# Altium PCB LED_PCB_v2.PcbDoc
Units mil, origin at the board's own origin, x right, y up, seen from the top; angles counter-clockwise.
Board outline 1457.5 x 607.5 mil, 2 copper layers (Top Layer, Bottom Layer); 9 components, 6 nets, 29 pads, 0 vias.
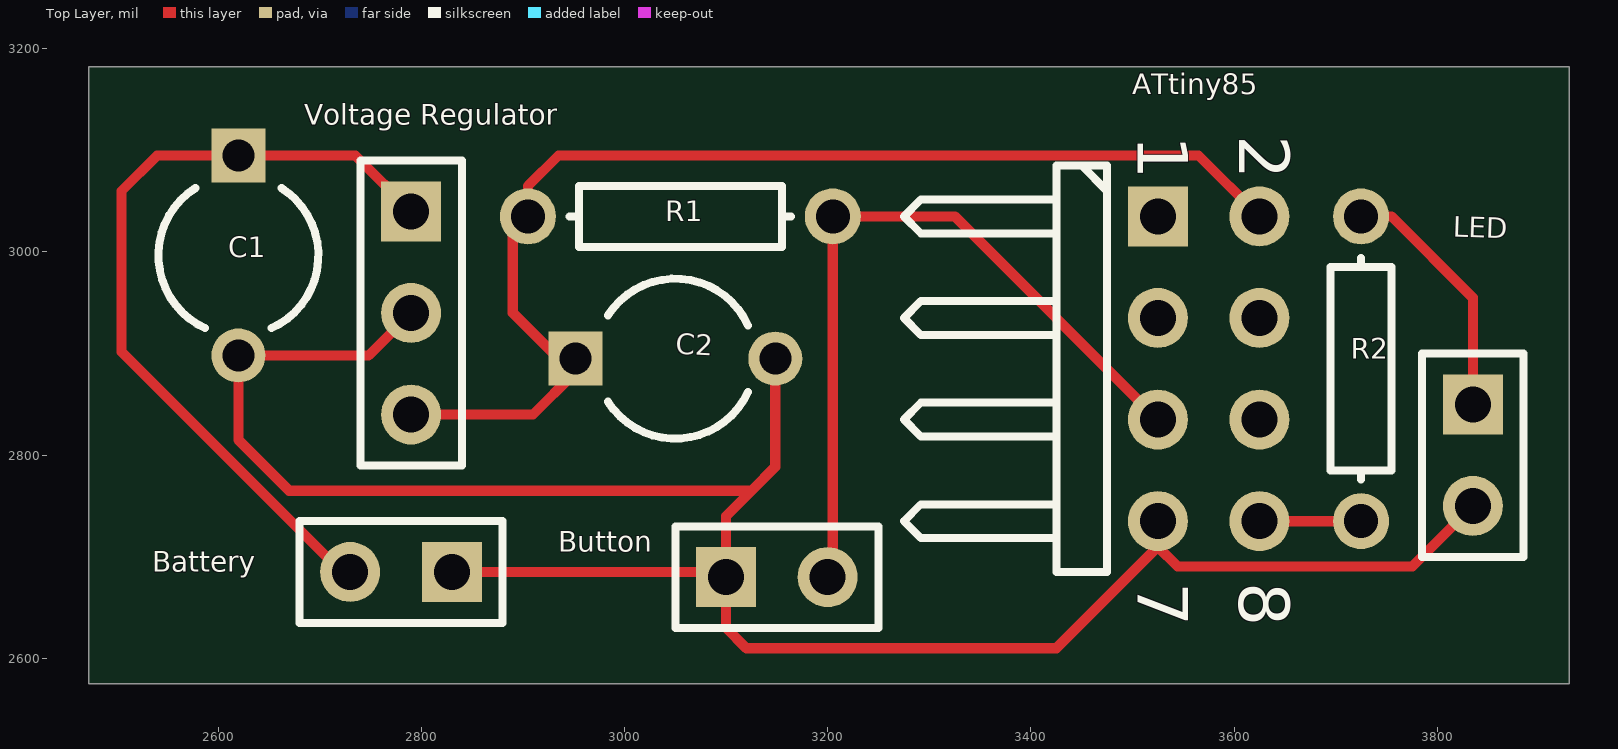
[diagram p0: Top Layer view]
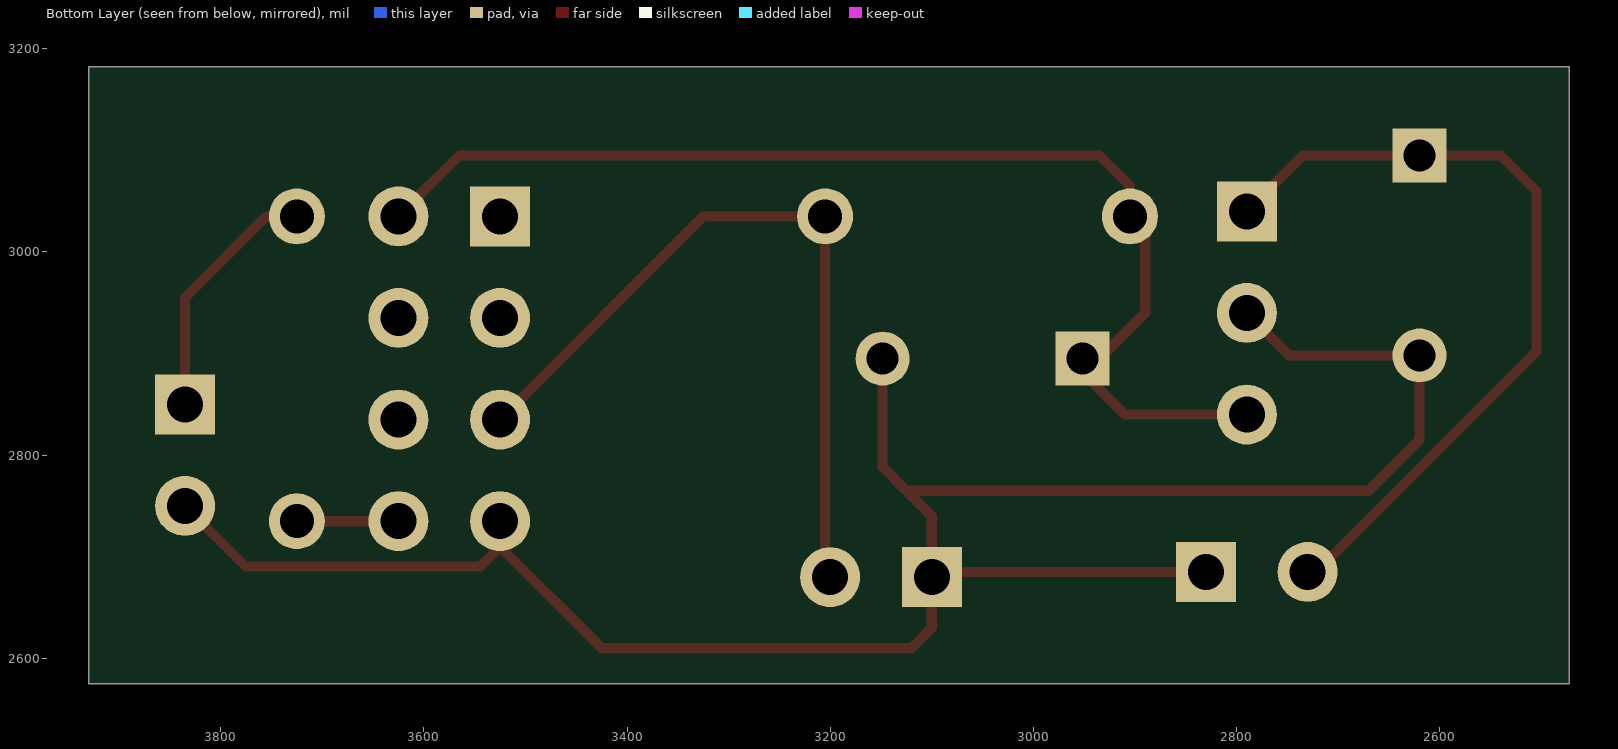
[diagram p1: Bottom Layer view, seen from below]

## Layer stack, top to bottom
Top Solder: solder mask 0.4, Solder Resist, Dk 3.5
Top Layer: signal copper 1.4
Dielectric 1: dielectric 12.6, FR-4, Dk 4.8
Bottom Layer: signal copper 1.4
Bottom Solder: solder mask 0.4, Solder Resist, Dk 3.5

## Board outline
2472.5,2575 3930,2575 3930,3182.5 2472.5,3182.5

## Design rules (kind name [scope] priority, off if disabled: settings)
Clearance [All] p1: gap=10 ignorepadtopadclearanceinfootprint=FALSE except(0: Arc-Hole Track-Hole SMDPad-Hole THPad-Hole Via-Hole Fill-Hole Poly-Hole Region-Hole Text-Hole)
PolygonConnect [All] p1: connectstyle=Relief reliefconductorwidth=10 reliefentries=4 polygonreliefangle="90 Angle" airgapwidth=10
RoomDefinition LED_Schematic_v3 [InComponentClass('LED_Schematic_v3')] p1: confinementstyle=ConfineIn formatcopy=TRUE lockcomponents=FALSE outline 2470,2575 3920,2575 3920,3180 2470,3180
RoutingVias [All] p1: holewidth=28 width=50 viastyle="Through Hole" minholewidth=28 minwidth=50 maxholewidth=28 maxwidth=50
SolderMaskExpansion [All] p1: expansion=4
Width [All] p1: maxlimit=10 minlimit=10 preferedwidth=10
30 further rules are at their usual default settings.

## Components (designator, comment, footprint, x,y, rotation, side; value= is the part's Value field where it differs from the comment)
ATtiny85 "Header 4X2H" HDR2X4H 3525,3035 r270 top
Battery "Header 2" HDR1X2 2830,2685 r180 top (schematic designator "9V Battery")
Button "Header 2" HDR1X2 3100,2680 r0 top
C1 "Capacitor" CAPR5-4X5 2620,2996.57 r270 top value=100pF
C2 "Capacitor" CAPR5-4X5 3050,2895 r0 top value=100pF
LED "Header 2" HDR1X2 3835,2850 r270 top
R1 "Resistor" AXIAL-0.3 3055,3035 r0 top value=4.7K
R2 "Resistor" AXIAL-0.3 3725,2885 r270 top value=1K
"Voltage Regulator" "3 pin header" HDR1X3 2790,3040 r270 top (schematic designator "Voltage Regulator - L7805")

## Footprints (in the part's own frame and the unit in brackets; to place one, negate y for a bottom-side part, rotate by r counter-clockwise, add the part's x,y. Pads: shape width x height; smd on the part's side, far side on the other; paste and mask are expansions set on the pad)
AXIAL-0.3 [mm] "Axial Device, Thru-Hole; 2 Leads; 0.3 in Pin Spacing"
  round 1.4 hole 0.85: 1(-3.81,0) 2(3.81,0)
  silkscreen extent -2.77,-0.76 2.77,0.76
CAPR5-4X5 [mm] "Capacitor; 2 Leads"
  rect 1.35x1.35 hole 0.8: 1(-2.5,0)
  round 1.35 hole 0.8: 2(2.5,0)
  silkscreen extent -1.69,-2 1.82,2
HDR1X2 [mm] "Connector; Header; 2 Position"
  rect 1.5x1.5 hole 0.9: 1(0,0)
  round 1.5 hole 0.9: 2(2.54,0)
  silkscreen extent -1.27,-1.27 3.81,1.27
HDR1X3 [mm] "Connector; Header; 3 Position"
  rect 1.5x1.5 hole 0.9: 1(0,0)
  round 1.5 hole 0.9: 2(2.54,0) 3(5.08,0)
  silkscreen extent -1.27,-1.27 6.35,1.27
HDR2X4H [mm] "Connector; Header; 4x2 Position; Right Angle"
  rect 1.5x1.5 hole 0.9: 1(0,0)
  round 1.5 hole 0.9: 2(0,2.54) 3(2.54,0) 4(2.54,2.54) 5(5.08,0) 6(5.08,2.54) 7(7.62,0) 8(7.62,2.54)
  silkscreen extent -1.27,-6.35 8.89,-1.27

## Part data
ATtiny85: "Header, 4-Pin, Dual row, Right Angle", LatestRevisionDate=17-Jul-2002, LatestRevisionNote="Re-released for DXP Platform.", Publisher="Altium Limited"
Battery Button LED: "Header, 2-Pin", LatestRevisionDate=17-Jul-2002, LatestRevisionNote="Re-released for DXP Platform.", Publisher="Altium Limited"
C1 C2: library part Cap2, PackageDescription="Capacitor; 2 Leads", PackageReference=CAPR5-4X5, Published=23-Sep-2002, Publisher="Altium Limited"
R1 R2: library part Res1, LatestRevisionDate=17-Jul-2002, LatestRevisionNote="Re-released for DXP Platform.", PackageDescription="Axial Device, Thru-Hole; 2 Leads; 0.3 in Pin Spacing", PackageReference=AXIAL-0.3, Published=8-Jun-2000, Publisher="Altium Limited"
"Voltage Regulator": library part "Header 3", "Header, 3-Pin", LatestRevisionDate=17-Jul-2002, LatestRevisionNote="Re-released for DXP Platform.", Publisher="Altium Limited"

## Free pads (board coordinates)
  round 60 on Drill Guide: 11(2505,3145) 13(3885,3145) 14(3885,2610) 15(2505,2610)

## Nets (pads, with @x,y where several pads share a name; then routed paths per layer and width w, separated by ;. In a path a pad name is that pad's centre, name@x,y a point inside that pad or via, vN(x,y) a via of type N, cw(c..) or ccw(c..) an arc to the next point about the centre after c; other vN are vias at no path point)
GND: "Voltage Regulator.2" ATtiny85.7 Battery.1 Button.1 C1.2 C2.2 LED.2 | length 2170.8
  Top Layer w10: 2790,2940 2748.15,2898.15 C1.2 2620,2815 2670,2765 3125,2765 ; Battery.1 3095,2685 Button.1 ; C2.2 3148.43,2788.43 3125,2765 ; LED.2 3775.47,2690.47 3544.53,2690.47 3525,2710 3425,2610 3120,2610 3100,2630 Button.1 ; Button.1 3100,2740 3125,2765
"Net9V Battery_2": "Voltage Regulator.1" Battery.2 C1.1 | length 795.3
  Top Layer w10: Battery.2 2721.72,2685 2505,2901.72 2505,3060 2540,3095 C1.1 2735,3095 2790,3040
NetATtiny85_2: "Voltage Regulator.3" ATtiny85.2 C2.1 R1.1 | length 1149.9
  Top Layer w10: 2790,2840 2910,2840 2950,2880 2890,2940 2890,3020 R1.1 2905,3065 2935,3095 3565,3095 ATtiny85.2
NetATtiny85_5: ATtiny85.5 Button.2 R1.2 | length 759.9
  Top Layer w10: Button.2 3205,2685 R1.2 3325,3035 ATtiny85.5
NetATtiny85_8: ATtiny85.8 R2.2 | length 100
  Top Layer w10: ATtiny85.8 R2.2
NetLED_1: LED.1 R2.1 | length 248.1
  Top Layer w10: R2.1 3755,3035 3835,2955 LED.1
pads on no net: ATtiny85.1 ATtiny85.3 ATtiny85.4 ATtiny85.6

## Text inside footprints (layer, text, board x,y; h text height)
ATtiny85: Top Overlay "8" at 3605,2675 h50 r270; Top Overlay "7" at 3505,2675 h50 r270; Top Overlay "1" at 3505,3115 h50 r270; Top Overlay "2" at 3605,3115 h50 r270